# EAGLE board Valve_Controller1 (EAGLE 6.4)
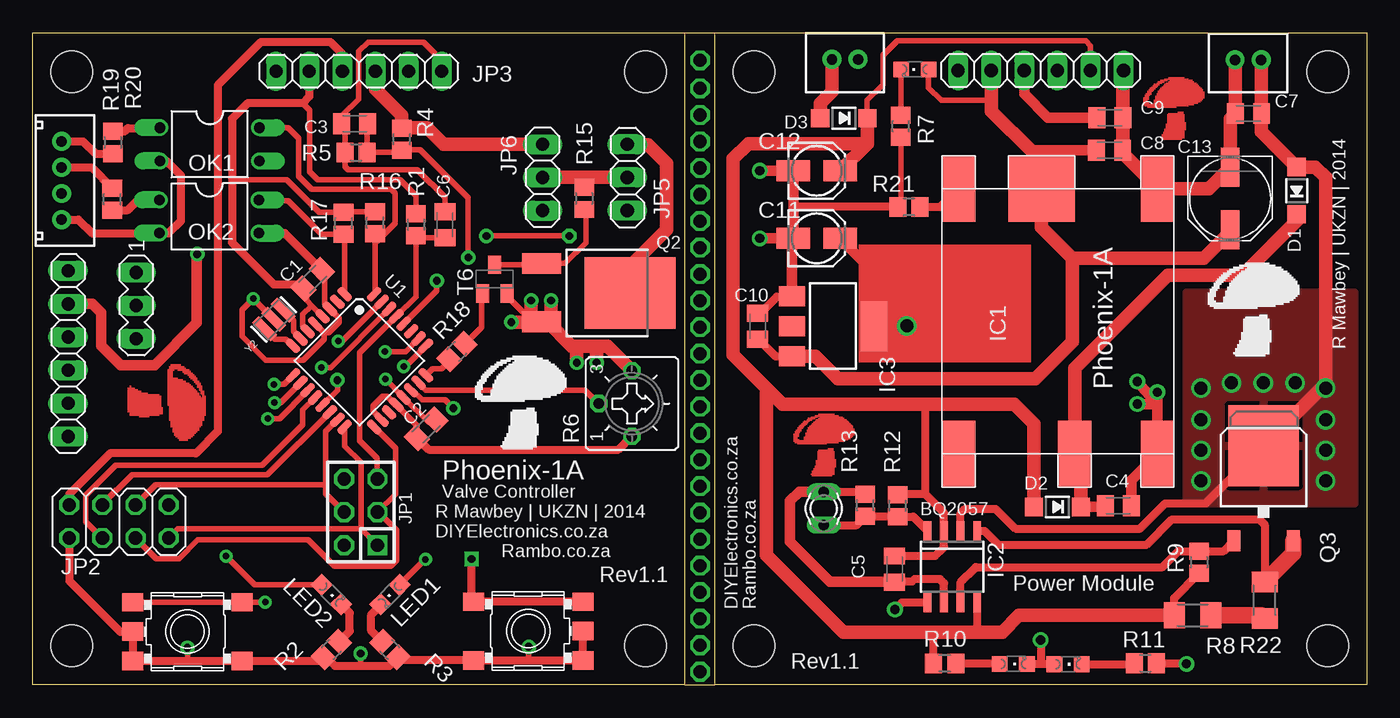
[diagram p0: board, top side]
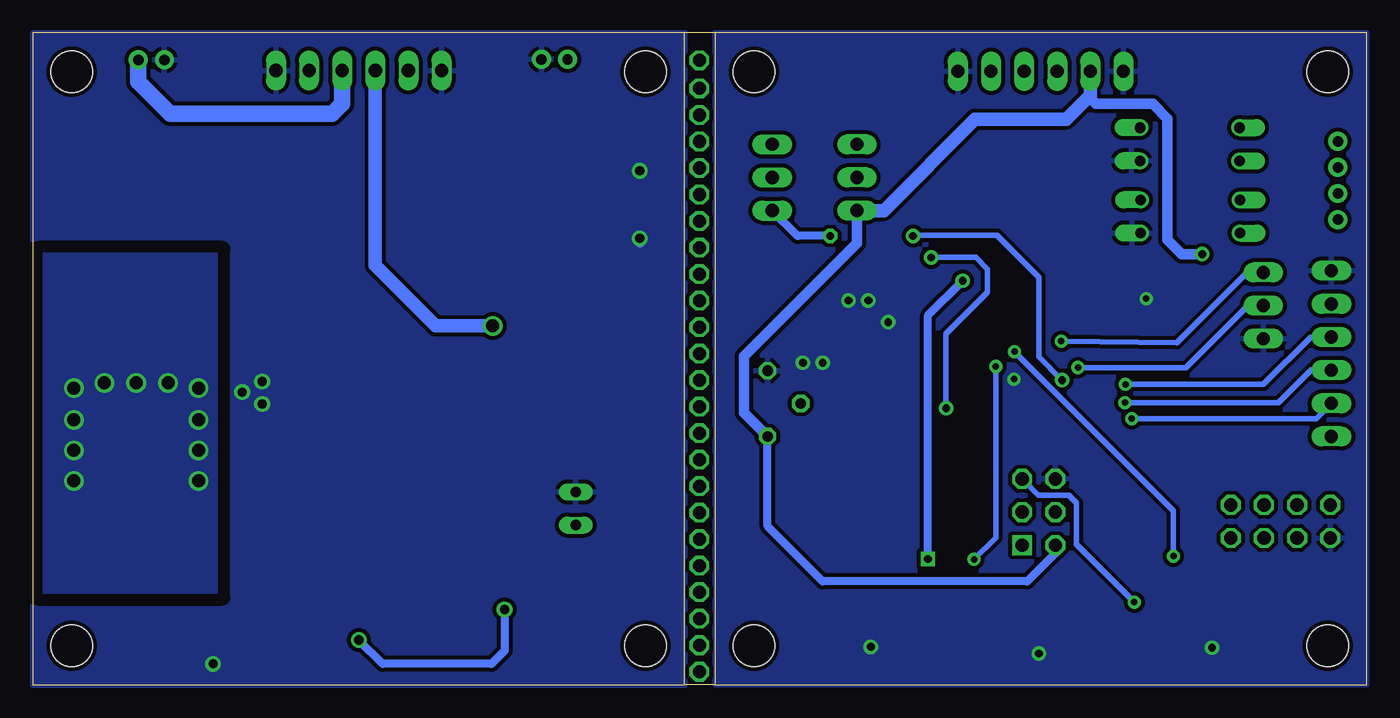
[diagram p1: board, bottom side, seen from below]

Size 102.3 x 50 mm. Coordinates in mm from the lower left corner, seen from the top.
Outline: 50,50 0,50 0,0 50,0
Outline: 50,50 50,0
Outline: 50,50 52.3,50
Outline: 50,0 52.3,0
Outline: 52.3,0 52.3,50 102.3,50 102.3,0 52.3,0
Copper layers (1*16): Top 0.035mm / dielectric 0mil / Bottom 0.035mm
Design rules "Master Circuits *": minimum track width 0.2mm, minimum drill 0.4mm, track to track 0.2mm, track to pad 0.2mm, pad to pad 0.2mm, via to via 0.2mm, smd to smd 0.2mm, copper to edge 0mil, drill to drill 8mil, minimum pad ring 0.25mm, minimum via ring 0.25mm, stop-mask expansion 4mil, vias tented up to drill 0mil, thermal gap 12mil
Net classes: 0 default: width 0.152 mm, drill 0.305 mm, clearance 0.152 mm
Holes 3.2 mm at 3,3 3,47 47,47 47,3 55.3,3 55.3,47 99.3,47 99.3,3
bRestrict: 4 lines

## Footprints (pad centres in the part's own frame; a part is rotated, then mirrored left to right if it is on the bottom)
C0805K = smd 1.3 x 1.6: 1 -1,0; 2 1,0
153CLV-0405 = smd 2.6 x 1.6: + 1.8,0; - -1.8,0
PANASONIC_D = smd 3 x 1.4: + 2.4,0; - -2.4,0
SOD123 = smd 1.4 x 1.4: A 1.805,0; C -1.805,0
KIS-3R33S = smd 5.08 x 2.54: 1 10.16,-7.62; 2 10.16,1.27; 3 10.16,7.62; 4 -10.16,7.62; 6 -10.16,-7.62 | smd 5.08 x 5.08: 5 -10.16,-1.27
D_R-PDSO-G8 = smd 0.6 x 1.5: 1 -1.905,-2.75; 2 -0.635,-2.75; 3 0.635,-2.75; 4 1.905,-2.75; 5 1.905,2.75; 6 0.635,2.75; 7 -0.635,2.75; 8 -1.905,2.75
SOT223 = smd 1.5 x 2: 1 -2.3,-3.15; 2 0,-3.15; 3 2.3,-3.15 | smd 3.8 x 2: 4 0,3.15
AVR-ISP-6 = drill 1.016 square: 1 -2.54,-1.27 | drill 1.016 octagon: 2 -2.54,1.27; 3 0,-1.27; 4 0,1.27; 5 2.54,-1.27; 6 2.54,1.27
2X04 = drill 1.016 octagon: 1 -3.81,-1.27; 2 -3.81,1.27; 3 -1.27,-1.27; 4 -1.27,1.27; 5 1.27,-1.27; 6 1.27,1.27; 7 3.81,-1.27; 8 3.81,1.27
1X06 = drill 1.016 long: 1 -6.35,0; 2 -3.81,0; 3 -1.27,0; 4 1.27,0; 5 3.81,0; 6 6.35,0
1X03 = drill 1.016 long: 1 -2.54,0; 2 0,0; 3 2.54,0
CHIPLED_0805 = smd 1.2 x 1.2: A 0,-1.05; C 0,1.05
DIL04 = drill 0.813 offset: 1 -1.27,-3.81; 2 1.27,-3.81; 3 1.27,3.81; 4 -1.27,3.81
DPAK = smd 1.6 x 2.997: 1 -2.261,-4.928; 3 2.21,-4.928 | smd 5.452 x 7: 4 0,1.853
D-PAK_TO252AA = smd 1 x 1.6: 1 -2.28,-4.8; 3 2.28,-4.8 | smd 5.4 x 6.2: 4 0,2.5
R0805 = smd 1.3 x 1.5: 1 -0.85,0; 2 0.85,0
CT6 = drill 0.813 octagon: A 2.515,0; E -2.515,0; S 0,-2.54
M1206 = smd 1.6 x 2: 1 -1.4,0; 2 1.4,0
P640 = drill 0.813 long: 1 -1.27,0; 2 1.27,0
SKHMPXE010 = smd 1.6 x 1.4: 1 -4.2,2.25; 2 4.2,2.25; 3 -4.2,-2.25; 4 4.2,-2.25; 5 4.2,0
MA03-1 = drill 1.016 long: 1 -2.54,0; 2 0,0; 3 2.54,0
SOT23-BEC = smd 1 x 1.4: B -0.95,-1.1; C 0,1.1; E 0.95,-1.1
TQFP32A = smd 1.27 x 0.559: 1 -4.4,2.8; 2 -4.4,2; 3 -4.4,1.2; 4 -4.4,0.4; 5 -4.4,-0.4; 6 -4.4,-1.2; 7 -4.4,-2; 8 -4.4,-2.8; 17 4.4,-2.8; 18 4.4,-2; 19 4.4,-1.2; 20 4.4,-0.4; 21 4.4,0.4; 22 4.4,1.2; 23 4.4,2; 24 4.4,2.8 | smd 0.559 x 1.27: 9 -2.8,-4.4; 10 -2,-4.4; 11 -1.2,-4.4; 12 -0.4,-4.4; 13 0.4,-4.4; 14 1.2,-4.4; 15 2,-4.4; 16 2.8,-4.4; 25 2.8,4.4; 26 2,4.4; 27 1.2,4.4; 28 0.4,4.4; 29 -0.4,4.4; 30 -1.2,4.4; 31 -2,4.4; 32 -2.8,4.4
PHR-2 = drill 0.8 pad 1.45: P$1 1,0; P$2 -1,0
PHR-4 = drill 0.8 pad 1.45: P$1 -3,0.5; P$2 -1,0.5; P$3 1,0.5; P$4 3,0.5
RESONATOR = smd 0.7 x 2: 1 -1,0; 2 0,0; 3 1,0

## Placement (x,y rotation side)
C1  100nF  [C0805K]  21.46,31.09 45 top
C2  100nF  [C0805K]  30.18,19.63 45 top
C3  100nF  [C0805K]  24.7,43.02 180 top
C4  0.1uF  [C0805K]  83.24,13.74 0 top
C5  100nF  [C0805K]  66.09,8.89 270 top
C6  100nF  [C0805K]  31.61,35.26 90 top
C7  100nF  [C0805K]  93.22,43.8 180 top
C8  0.1uF  [C0805K]  82.57,40.98 0 top
C9  0.1uF  [C0805K]  82.59,43.48 0 top
C10  0.33uF  [C0805K]  55.59,27.49 90 top
C11  10uF  [153CLV-0405]  60.12,34.23 0 top
C12  10uF  [153CLV-0405]  60.12,39.41 0 top
C13  100uF  [PANASONIC_D]  91.82,37.28 270 top
D1  MBR0540  [SOD123]  96.91,37.89 90 top
D2  MBR0540  [SOD123]  78.57,13.65 180 top
D3  MBR0540  [SOD123]  62.2,43.45 180 top
IC1  KIS-3R33S  [KIS-3R33S]  78.63,27.87 270 top
IC2  BQ2057WSNG4  [D_R-PDSO-G8]  70.51,9.06 180 top
IC3  LD117AS33TR  [SOT223]  61.36,27.5 270 top
JP1  AVR-ISP-6  [AVR-ISP-6]  25.16,13.25 90 top
JP2  NRF24L01  [2X04]  6.62,12.53 0 top
JP3  [1X06]  25.02,47.04 180 top
JP4  [1X06]  2.72,25.4 270 top
JP5  [1X03]  45.6,38.9 90 top
JP6  [1X03]  39.1,38.9 270 top
JP7  [1X06]  77.29,47.09 180 top
LED1  [CHIPLED_0805]  27.41,6.92 135 top
LED2  [CHIPLED_0805]  22.89,6.93 225 top
LED3  PWRLED  [CHIPLED_0805]  67.64,47.18 90 top
LED4  Done  [CHIPLED_0805]  75.18,1.61 270 top
LED5  Chg  [CHIPLED_0805]  79.38,1.59 270 top
OK1  LTV816  [DIL04]  13.58,41.44 270 top
OK2  LTV816  [DIL04]  13.55,35.91 270 top
Q2  IRFR3504  [DPAK]  43.95,30.05 270 top
Q3  IRFR5305  [D-PAK_TO252AA]  94.39,15.85 0 top
R1  10K  [R0805]  29.39,35.27 270 top
R2  1K  [R0805]  22.91,2.72 45 top
R3  1K  [R0805]  27.39,2.72 135 top
R4  20k  [R0805]  28.3,41.82 90 top
R5  20k  [R0805]  24.8,40.82 0 top
R6  10k  [CT6]  45.95,21.57 270 top
R7  1K  [R0805]  66.56,42.82 90 top
R8  0E2  [M1206]  88.93,5.34 180 top
R9  1K  [R0805]  89.42,9.4 270 top
R10  1K  [R0805]  69.92,1.66 180 top
R11  1K  [R0805]  85.32,1.67 0 top
R12  1K  [R0805]  66.32,13.75 90 top
R13  1K  [R0805]  63.84,13.77 90 top
R14  Bat Temp Sens  [P640]  60.66,13.52 90 top
R15  4K7  [R0805]  42.29,37.29 270 top
R16  10K  [R0805]  26.26,35.42 90 top
R17  10K  [R0805]  23.84,35.4 90 top
R18  1K  [R0805]  32.53,25.56 45 top
R19  680  [R0805]  6.1,37.24 90 top
R20  680  [R0805]  6.15,41.58 270 top
R21  10K  [R0805]  67.19,36.64 180 top
R22  0E2  [M1206]  94.46,6.5 270 top
S1  Reset  [SKHMPXE010]  11.87,4.09 180 top
S2  Test  [SKHMPXE010]  38,4.13 0 top
SV1  UART  [MA03-1]  7.95,29.08 270 top
T6  [SOT23-BEC]  35.43,31.11 0 top
U1  ATMEGA328P  [TQFP32A]  25.06,24.86 315 top
U$4  Batt  [PHR-2]  93.19,47.91 0 top
U$5  PwrIn  [PHR-2]  62.28,47.94 0 top
U$7  Input  [PHR-4]  2.72,38.67 90 top
Y2  16MHz  [RESONATOR]  18.49,28.02 225 top

## Library data of the parts
C1-C13 R1-R5 R7-R13 R15-R22 = resistor
D1-D3 = diode
IC1 = KIS-3R33S
IC2 U$4 U$5 U$7 = RobThePyro
IC3 = v-reg
JP1 = atmel
JP2-JP7 = pinhead
LED1-LED5 = led
OK1 OK2 = optocoupler; OC_FARNELL: unknown; OC_NEWARK: unknown
Q2 = transistor-fet
Q3 = transistor-power
R6 = pot
R14 = ptc-ntc; OC_FARNELL: unknown; OC_NEWARK: unknown
S1 S2 = switch
SV1 = con-lstb; OC_FARNELL: unknown; OC_NEWARK: unknown
T6 = transistor
U1 = atmel-avr
Y2 = SmartPrj

## Nets
12V: C5.1 C12.+ D2.A D3.C IC2.3 IC2.8 JP7.2 R8.2 R9.2 R10.2 R12.2
+3V1: C9.1 C11.+ IC3.4 JP7.4
+3V3: JP2.2 JP3.4
+5V: C1.1 C2.1 JP1.2 JP3.5 JP4.2 JP6.3 R1.1 R6.A R16.2 R17.2 U1.4 U1.6 U1.18 U1.20
+5V1: C8.1 C10.1 C13.+ IC1.5 IC3.3 JP7.5 LED3.A
CE: JP2.3 U1.12
CSN: JP2.4 U1.14
GND: C1.2 C2.2 C3.2 C6.2 JP1.6 JP2.1 JP3.1 JP3.6 JP4.1 OK1.3 OK2.3 Q2.3 R2.1 R3.1 R5.1 R6.E S1.1 S1.2 S1.5 S2.3 S2.4 S2.5 SV1.3 T6.E U1.3 U1.5 U1.21 Y2.2
GND1: C4.2 C5.2 C7.2 C8.2 C9.2 C10.2 C11.- C12.- C13.- IC1.3 IC1.4 IC2.6 IC3.1 JP7.1 JP7.6 R7.1 R11.2 R13.2 R14.2 R21.2 U$4.P$2 U$5.P$1
IN0: OK1.4 R16.1 U1.32
IN1: OK2.4 R17.1 U1.1
MISO: JP1.1 JP2.7 U1.16
MOSI: JP1.4 JP2.6 U1.15
N$1: Q2.1 R15.2 T6.C
N$2: R6.S U1.23
N$3: LED1.A U1.25
N$4: LED2.A U1.26
N$5: JP2.8
N$6: R18.2 T6.B
N$7: U1.19
N$8: IC2.5 LED4.C LED5.A
N$9: U1.8 Y2.3
N$10: U1.7 Y2.1
N$11: U1.2
N$12: LED2.C R2.2
N$13: LED1.C R3.2
N$14: LED3.C R7.2
N$15: LED4.A R10.1
N$16: IC1.6 R21.1
N$17: D3.A U$5.P$2
N$18: JP5.2 JP6.2 R15.1
N$19: R8.1 R22.2
N$22: JP5.3 Q2.4
N$24: OK1.2 OK2.2 U$7.P$1
N$27: IC2.1 Q3.3 R22.1
N$29: IC2.7 Q3.1 R9.1
N$30: LED5.C R11.1
N$32: IC2.4 R12.1 R13.1 R14.1
N$33: R20.2 U$7.P$4
N$37: R19.2 U$7.P$3
N$39: OK1.1 R20.1
N$40: OK2.1 R19.1
PC4: U1.27
PD5: JP4.3 U1.9
PD6: JP4.4 U1.10
PD7: JP4.5 U1.11
RESET: C6.1 JP1.5 R1.2 S1.3 S1.4 U1.29
RXD: SV1.2 U1.30
SCK: JP1.3 JP2.5 U1.17
SERVOCTL: R18.1 U1.24
SERVOSIG: JP5.1 U1.13
TST: S2.1 S2.2 U1.28
TXD: SV1.1 U1.31
VBAT: JP3.3 JP6.1 R4.2
VBAT1: C7.1 D1.A IC2.2 JP7.3 Q3.4 U$4.P$1
VBATSENS: C3.1 R4.1 R5.2 U1.22
VIN: JP3.2
VIN1: C4.1 D1.C D2.C IC1.2

## Tracks (layer width: path | path; a pad name or v marks a point on that pad's centre or on a via)
12V
  Top 0.406: JP7.2 81.1,49.01 80.74,49.37 66.31,49.37 65.2,48.25 65.2,46.02 63.98,44.8 63.98,43.47 D3.C
  Top 0.61: C5.1 69.2,9.89 69.87,10.56 IC2.3 69.87,13.2 68.45,14.62 | IC2.8 72.41,4.16 72.51,4.06 | R10.2 69.07,3.94 68.96,4.06 | 68.45,14.62 66.34,14.62 R12.2 | 68.45,14.62 68.45,21.33 68.25,21.53 | R8.2 87.53,6.66 R9.2
  Top 1.016: D3.C 64,41.5 | 64,41.5 C12.+ | 64,41.5 54.89,41.5 53.72,40.33 53.72,25.29 56.26,22.75 | R8.2 75.63,5.34 74.34,4.06 72.51,4.06 68.96,4.06 62.15,4.06 56.26,9.95 56.26,22.75 | 56.26,22.75 57.48,21.53 68.25,21.53 75.26,21.53 76.78,20.01 76.78,13.46 D2.A
+3V1  (via drill 1)
  Top 0.813: IC3.4 64.52,31.64 C11.+ | C9.1 77.85,43.48 76.02,45.31 JP7.4
  Top 1.016: v67.03,27.53 64.55,27.53 IC3.4
  Bottom 1.016: JP7.4 76.02,32.16 71.39,27.53 v67.03,27.53
+3V3
  Top 0.61: JP3.4 23.75,48.36 22.84,49.28 17.5,49.28 14.2,45.97 14.2,19.43 12.52,17.75 5.94,17.75 2.81,14.62 JP2.2
+5V  (via drill 0.6)
  Top 0.406: 21,29.9 21,29.49 21.44,29.04 | 21.44,29.04 U1.4 | U1.6 20.7,27.52 20.7,28.4 21.34,29.04 21.44,29.04 | R16.2 23.86,36.27 R17.2 21.98,36.25 19.49,38.73 15.43,38.73 15.3,38.86 | U1.18 26.11,20.98 26.11,21.41 26.82,22.12 27.18,22.12 27.84,21.47 U1.20 29.47,19.89 C2.1 | R1.1 29.39,37.48 28.17,38.71 21.87,38.71 21.23,39.34 21.23,44.07 20.7,44.6
  Top 0.61: JP3.5 21.2,45.1 20.7,44.6 16.5,44.6 15.3,43.4 15.3,38.86 15.3,33.9 18.5,30.7 20.2,30.7 21,29.9 21,30.14 C1.1 | C2.1 30.36,18.03 44.91,18.03 45.93,19.06 R6.A
  Top 0.813: JP4.2 4.57,29.21 5.26,28.52 5.26,26.01 6.76,24.51 9.35,24.51 12.6,27.76 12.6,32.99 v12.62,33.02
  Bottom 0.61: JP1.2 23.9,10.08 26.04,7.95 41.73,7.95 45.95,12.17 R6.A
  Bottom 0.813: R6.A 47.75,20.86 47.75,25.2 39.1,33.85 JP6.3 | v12.62,33.02 14.18,33.02 15.3,34.14 15.3,43.4 16.43,44.53 20.78,44.53 21.34,45.09
  Bottom 1.016: JP3.5 21.2,45.22 21.34,45.09 23.05,43.37 30.04,43.37 37.05,36.36 JP6.3
+5V1
  Top 0.406: LED3.A 68.69,45.77 69.67,44.8 73.33,44.8 73.53,44.6
  Top 0.61: C10.1 55.67,26.49 56.97,25.19 IC3.3
  Top 0.813: C8.1 76.82,40.98 76.68,40.84
  Top 1.016: JP7.5 73.53,47.05 73.53,44.6 73.53,43.99 76.68,40.84 77.36,40.16 IC1.5 77.36,35.08 79.73,32.71 | IC3.3 60.01,25.2 61.74,23.46 76.88,23.46 79.73,26.31 79.73,32.71 | C13.+ 91.82,34.74 89.78,32.71 79.73,32.71
CE
  Top 0.406: JP2.3 4.09,12.52 4.09,14.55 6.38,16.84 17.61,16.84 20.7,19.93 20.7,21.08 21.65,22.03 U1.12
CSN
  Top 0.406: U1.14 18,16.1 7.62,16.1 5.35,13.83 JP2.4
GND  (via drill 0.5, 0.6)
  Top 0.406: C1.2 22.17,31.43 22.4,31.2 22.4,29.22 U1.3 22.8,28.8 23.5,28.1 23.5,27.8 22.7,27 22.35,27 U1.5 | v11.87,2.86 11.87,1.91 | v25.15,2.41 25.15,1.52 25.21,1.46 | v38.04,2.92 38.04,1.97 | C2.2 31.25,20.34 31.45,20.14 30.34,20.14 U1.21 v27.05,23.43 v27.05,23.44 | Y2.2 18.49,28.04 v16.92,29.62 16.05,28.75 16.05,26.72 17.88,24.89 20.75,24.89 22.35,26.49 22.35,26.98 | JP3.1 31.36,47.88 29.97,49.28 25.7,49.28 24.99,48.56 24.99,44.91 23.7,43.61 C3.2 23.95,42.77 R5.1 23.95,39.73 24.18,39.5 29.49,39.5 31.62,37.36 31.62,36.27 C6.2 | T6.E 36.38,29.78 38.1,28.07
  Top 0.61: C1.2 19.33,34.64 OK2.3 | JP2.1 2.81,7.98 6.73,4.06 7.64,4.06 S1.5 S1.2 S1.1 22.03,1.84 R2.1 22.52,2.12 23.18,1.46 25.21,1.46 27.34,1.46 R3.1 28.23,1.88 S2.3 S2.4 S2.5
  Top 1.016: R6.E 44.07,25.97 43.18,25.97 | 43.18,25.97 41.66,25.97 | 41.66,25.97 41.34,25.97 39.47,27.84 Q2.3 | v36.7,27.81 39.12,27.81 38.86,28.07 38.1,28.07 38.23,28.19 v38.23,29.46 | v39.75,29.46 39.75,27.94 39.62,27.81 | v43.24,24.7 43.24,25.91 43.18,25.97 | v41.72,24.7 41.72,25.91 41.66,25.97
  Bottom 0.406: v16.92,29.62 16.92,29.67 16.84,29.74 | v27.05,23.44 26.92,23.57
  pour Bottom (isolate 0.305): 0,50 0,0 50,0 50,50
GND1  (via drill 0.7)
  Top 0.406: R7.1 66.56,36.86 R21.2
  Top 0.61: C10.2 55.8,28.49 57.07,29.76 58.18,29.76 IC3.1 | IC2.6 69.87,7.82 69.57,8.12 67.64,8.12 67.43,7.92 66.12,7.92 C5.2 | R14.2 63.67,14.79 R13.2 | R11.2 88.42,1.67 v88.46,1.62 | R21.2 58.35,36.64 58.32,36.67
  Top 0.813: 58.32,34.84 58.32,36.67 C12.- v55.75,39.41 | 58.32,34.84 C11.- v55.75,34.23 | IC3.1 58.22,34.74 58.32,34.84 | 66.12,7.92 61.13,7.92 58.09,10.97 58.09,14.12 58.8,14.83 60.63,14.83 R14.2 | C4.2 84.24,15.7 IC1.3 86.25,22.43 v86.23,22.45 | v84.7,21.53 86.13,21.53 86.23,21.64 86.23,21.53 v84.7,23.26
  Top 1.016: IC1.4 90.17,38.03 C13.- 91.82,43.39 92.19,43.77 | 92.19,43.77 C7.2 | 92.19,43.77 U$4.P$2 | JP7.1 83.58,47.03 C9.2 83.58,41 C8.2 83.57,40.75 86.33,37.99
  Bottom 0.61: v88.46,1.62 88.77,1.62
  Bottom 0.813: v86.23,22.45 86.23,22.55 86.13,22.65 | v55.75,39.41 55.55,39.41 | v55.75,34.23 55.85,34.03 55.75,33.93
  pour Bottom (isolate 0.305): 52.29,49.99 52.29,-0.01 102.29,-0.01 102.29,49.99
IN0
  Top 0.406: U1.32 26.26,30.02 26.26,34 | 26.26,34 R16.1 | OK1.4 17.4,42.7 19.6,42.7 20.4,41.9 20.4,39 21.4,38 27.5,38 27.8,37.7 27.8,35.4 26.4,34 26.26,34
IN1
  Top 0.406: U1.1 23.93,34.47 R17.1 22.15,34.55 19.6,37.1 17.44,37.1 OK2.4
MISO
  Top 0.406: JP1.1 25.17,11.97 | 25.17,11.97 25.17,17.07 23.93,18.31 U1.16 | JP2.7 11.14,11.97 25.17,11.97
MOSI
  Top 0.406: U1.15 22.48,19.45 22.48,15.34 | 22.48,15.34 22.48,14.67 JP1.4 | JP2.6 9.43,15.34 22.48,15.34
N$1
  Top 0.406: T6.C 38.94,32.22 Q2.1 40.81,32.31 42.42,33.91 42.42,36.31 R15.2
N$2
  Top 0.406: U1.23 30.14,22.61 42.37,22.61 R6.S
N$3  (via drill 0.5)
  Top 0.406: LED1.A v30.11,9.63 v30.12,9.63 | v28.45,24.41 28.68,24.64 28.8,24.64 U1.25
  Bottom 0.406: v30.12,9.63 28.45,11.3 v28.45,24.41
N$4  (via drill 0.5)
  Top 0.406: U1.26 28.58,25.55 v27.03,25.55 | v14.83,9.88 17.04,7.67 LED2.A
  Bottom 0.406: v27.03,25.55 14.83,13.36 v14.83,9.88
N$6
  Top 0.406: R18.2 33.15,26.16 34.42,27.43 34.42,29.95 T6.B
N$8  (via drill 0.7)
  Top 0.61: LED4.C 77.29,1.61 | 77.29,1.61 78.31,1.61 LED5.A | IC2.5 66.64,6.31 v66.11,5.79 | v77.29,3.45 77.29,1.61
  Bottom 0.61: v66.11,5.79 66.11,2.64 67.13,1.62 75.46,1.62 v77.29,3.45
N$9
  Top 0.406: Y2.3 18.59,26.5 19.4,26.5 19.91,25.99 U1.8
N$10
  Top 0.406: Y2.1 20,27.92 20,27.1 U1.7
N$12
  Top 0.61: R2.2 24.32,4.13 24.32,5.52 23.66,6.19 LED2.C
N$13
  Top 0.61: R3.2 25.97,4.14 25.97,5.4 26.67,6.09 LED1.C
N$14
  Top 0.406: LED3.C 66.59,43.7 R7.2
N$15
  Top 0.61: R10.1 74.09,1.66 LED4.A
N$16
  Top 0.61: R21.1 69.61,36.64 IC1.6
N$17
  Top 1.016: U$5.P$2 61.28,45.46 60.42,44.6 60.42,43.48 D3.A
N$18
  Top 0.406: R15.1 42.29,38.9
  Top 1.016: JP6.2 42.29,38.9 JP5.2
N$19
  Top 1.27: R8.1 94.21,5.34 R22.2
N$22
  Top 1.016: Q2.4 45.81,32.11 48.6,34.9 48.6,40 47.2,41.4 45.64,41.4 JP5.3
N$24
  Top 0.61: U$7.P$1 3.51,35.67 4.57,34.61 9.71,34.61 OK2.2 9.77,34.61 10.41,34.61 11.37,35.56 11.37,39.05 10.25,40.17 OK1.2
N$27
  Top 0.61: IC2.1 72.99,11.81 74.04,10.76 85.42,10.76 87.35,12.69 94.05,12.69 94.46,12.29 R22.1
  Top 1.27: Q3.3 96.67,10.1 R22.1
N$29
  Top 0.61: 91.98,11.17 Q3.1 91.31,10.25 R9.1 87.85,10.26 86.64,9.04 72.31,9.04 71.14,7.87 IC2.7
N$30
  Top 0.61: LED5.C 84.4,1.59 R11.1
N$32
  Top 0.61: IC2.4 67.52,12.9 R12.1 63.86,12.9 R13.1 63.18,12.25 R14.1
N$33
  Top 0.61: U$7.P$4 3.86,41.67 4.83,40.7 6.13,40.7 R20.2
N$37
  Top 0.61: U$7.P$3 4.52,39.67 R19.2
N$39
  Top 0.61: R20.1 7.06,42.42 7.3,42.67 9.73,42.67 OK1.1
N$40
  Top 0.61: R19.1 7.3,36.39 8.06,37.15 9.71,37.15 OK2.1
PD5  (via drill 0.5)
  Top 0.406: U1.9 19.28,23.04 v18.52,23.04
  Bottom 0.406: v18.52,23.04 7.92,23.04 4.32,26.64 2.75,26.64 JP4.3
PD6  (via drill 0.5)
  Top 0.406: U1.10 19.01,21.64 v18.54,21.64
  Bottom 0.406: v18.54,21.64 6.78,21.64 4.27,24.16 2.75,24.16 JP4.4
PD7  (via drill 0.5)
  Top 0.406: v18.03,20.42 18.92,20.42 U1.11
  Bottom 0.406: JP4.5 3.89,20.42 v18.03,20.42
RESET  (via drill 0.5)
  Top 0.406: JP1.5 26.43,17.38 25.08,18.73 25.08,25.45 U1.29 29.39,29.76 R1.2 29.55,34.26 C6.1 | S1.4 S1.3 v17.83,6.35
  Bottom 0.406: v17.83,6.35 22.28,10.79 22.28,13.97 22.84,14.53 25.17,14.53 JP1.5
RXD  (via drill 0.5)
  Top 0.4: U1.30 22.84,24.33
  Top 0.406: 22.84,24.33 v22.15,24.33
  Bottom 0.406: v22.15,24.33 13.89,24.33 9.14,29.08 SV1.2
S$1  (via drill 1)
  other vias: 51.18,1.02
S$2  (via drill 1)
  other vias: 51.18,3.05
S$3  (via drill 1)
  other vias: 51.18,5.08
S$4  (via drill 1)
  other vias: 51.18,7.11
S$5  (via drill 1)
  other vias: 51.18,9.14
S$6  (via drill 1)
  other vias: 51.18,11.18
S$7  (via drill 1)
  other vias: 51.18,13.21
S$8  (via drill 1)
  other vias: 51.18,15.24
S$9  (via drill 1)
  other vias: 51.18,17.27
S$10  (via drill 1)
  other vias: 51.18,19.3
S$11  (via drill 1)
  other vias: 51.18,21.34
S$12  (via drill 1)
  other vias: 51.18,23.37
S$13  (via drill 1)
  other vias: 51.18,25.4
S$14  (via drill 1)
  other vias: 51.18,27.43
S$15  (via drill 1)
  other vias: 51.18,29.46
S$16  (via drill 1)
  other vias: 51.18,31.5
S$17  (via drill 1)
  other vias: 51.18,33.53
S$18  (via drill 1)
  other vias: 51.18,35.56
S$19  (via drill 1)
  other vias: 51.18,37.59
S$20  (via drill 1)
  other vias: 51.18,39.62
S$21  (via drill 1)
  other vias: 51.18,41.66
S$22  (via drill 1)
  other vias: 51.18,43.69
S$23  (via drill 1)
  other vias: 51.18,45.72
S$24  (via drill 1)
  other vias: 51.18,47.88
SCK
  Top 0.406: U1.17 26.2,19.77 27.81,18.16 27.81,14.63 JP1.3 26.52,13.25 27.91,11.86 27.91,9.58 27.46,9.12 23.14,9.12 21.11,11.15 12.85,11.15 12.83,11.12 12.68,11.12 11.23,9.68 9.47,9.68 JP2.5
SERVOCTL
  Top 0.406: R18.1 31.93,24.81 31.37,24.26 30.68,24.26 U1.24
SERVOSIG  (via drill 0.6)
  Top 0.406: U1.13 23.37,22.6 v23.37,23.37 | v34.8,34.42 v41.15,34.42
  Bottom 0.406: v23.37,23.37 25.15,25.15 25.15,31.24 28.38,34.48 34.73,34.48 v34.8,34.42
  Bottom 0.61: v41.15,34.42 43.66,34.42 JP5.1
TST  (via drill 0.6)
  Top 0.406: U1.28 30.99,30.22 v30.99,30.99
  Top 0.61: S2.2 S2.1 33.66,6.38 v33.66,9.65
  Bottom 0.61: v33.66,9.65 33.66,28.32 v30.99,30.99
TXD  (via drill 0.5)
  Top 0.406: U1.31 23.61,26.24 v23.43,26.35
  Bottom 0.406: v23.43,26.35 14.55,26.24 9.17,31.62 SV1.1
VBAT
  Top 1.016: JP3.3 26.29,45.67 28.3,43.66 R4.2 28.33,42.7 30.25,42.7 31.51,41.44 JP6.1
VBAT1  (via drill 1)
  Top 0.61: IC2.2 71.14,13.15 71.5,13.51 73.83,13.51 75.36,11.98 84.91,11.98 86.84,13.91 89.95,13.91 Q3.4
  Top 1.016: U$4.P$1 94.19,43.83 C7.1 94.22,42.39 D1.A 98.34,39.7 99.13,38.91 99.13,23.09 Q3.4
  Bottom 1.27: JP7.3 78.56,44.54 79.32,43.78 91.76,43.78 94.19,46.22 U$4.P$1
  other vias: 99.13,15.64 99.13,17.98 99.13,20.31 94.36,23.16 96.8,23.16 99.13,22.75 91.92,23.16 89.58,22.75 89.58,20.31 89.58,17.98 89.58,15.64
  pour Top: 88.46,13.91 101.37,13.91 101.37,30.07 88.46,30.07
  pour Bottom: 87.75,6.6 101.88,6.7 101.88,33.42 87.75,33.42
VBATSENS  (via drill 0.6)
  Top 0.406: C3.1 25.65,42.97 R5.2 28.15,40.82 R4.1 28.35,41.02 29.72,41.02 33.4,37.34 v33.4,32.77 | U1.22 29.09,22.6 29.84,21.84 31.62,21.84 v32.26,21.21
  Bottom 0.406: v32.26,21.21 32.26,26.92 29.08,30.1 29.08,31.88 29.97,32.77 v33.4,32.77
VIN1
  Top 0.813: D2.C 82.14,13.65 C4.1
  Top 1.016: 79.93,17.68 IC1.2 80.38,17.23 80.38,16.96 | D2.C 80.38,16.96 | D1.C 96.92,35.57 92.73,31.39 87.04,31.39 79.93,24.28 79.93,17.41 80.38,16.96
(copper drawn outside any net)
  shapes: Top area x187

## Text on the board
tNames: R Mawbey | UKZN | 2014 | Phoenix-1A | Phoenix-1A | Valve Controller | R Mawbey | UKZN | 2014 | BQ2057 | DIYElectronics.co.za | Rambo.co.za | Rev1.1 | Power Module | DIYElectronics.co.za | Rambo.co.za | Rev1.1
tValues: Gnd | Tx | 5V | Rx | PD5 | Gnd | PD4 | PD3